# Altium PCB BMS_MAINBOARD_3.PcbDoc (part 2 of 3)
Units mm, origin at the board's own origin, x right, y up, seen from the top; angles counter-clockwise.
Board outline 295.3 x 101.15 mm, 2 copper layers (Top Layer, Bottom Layer), stack 1.571 mm thick; 250 components, 184 nets, 817 pads, 458 vias.
Unrouted connection lines stored in the file: 84.
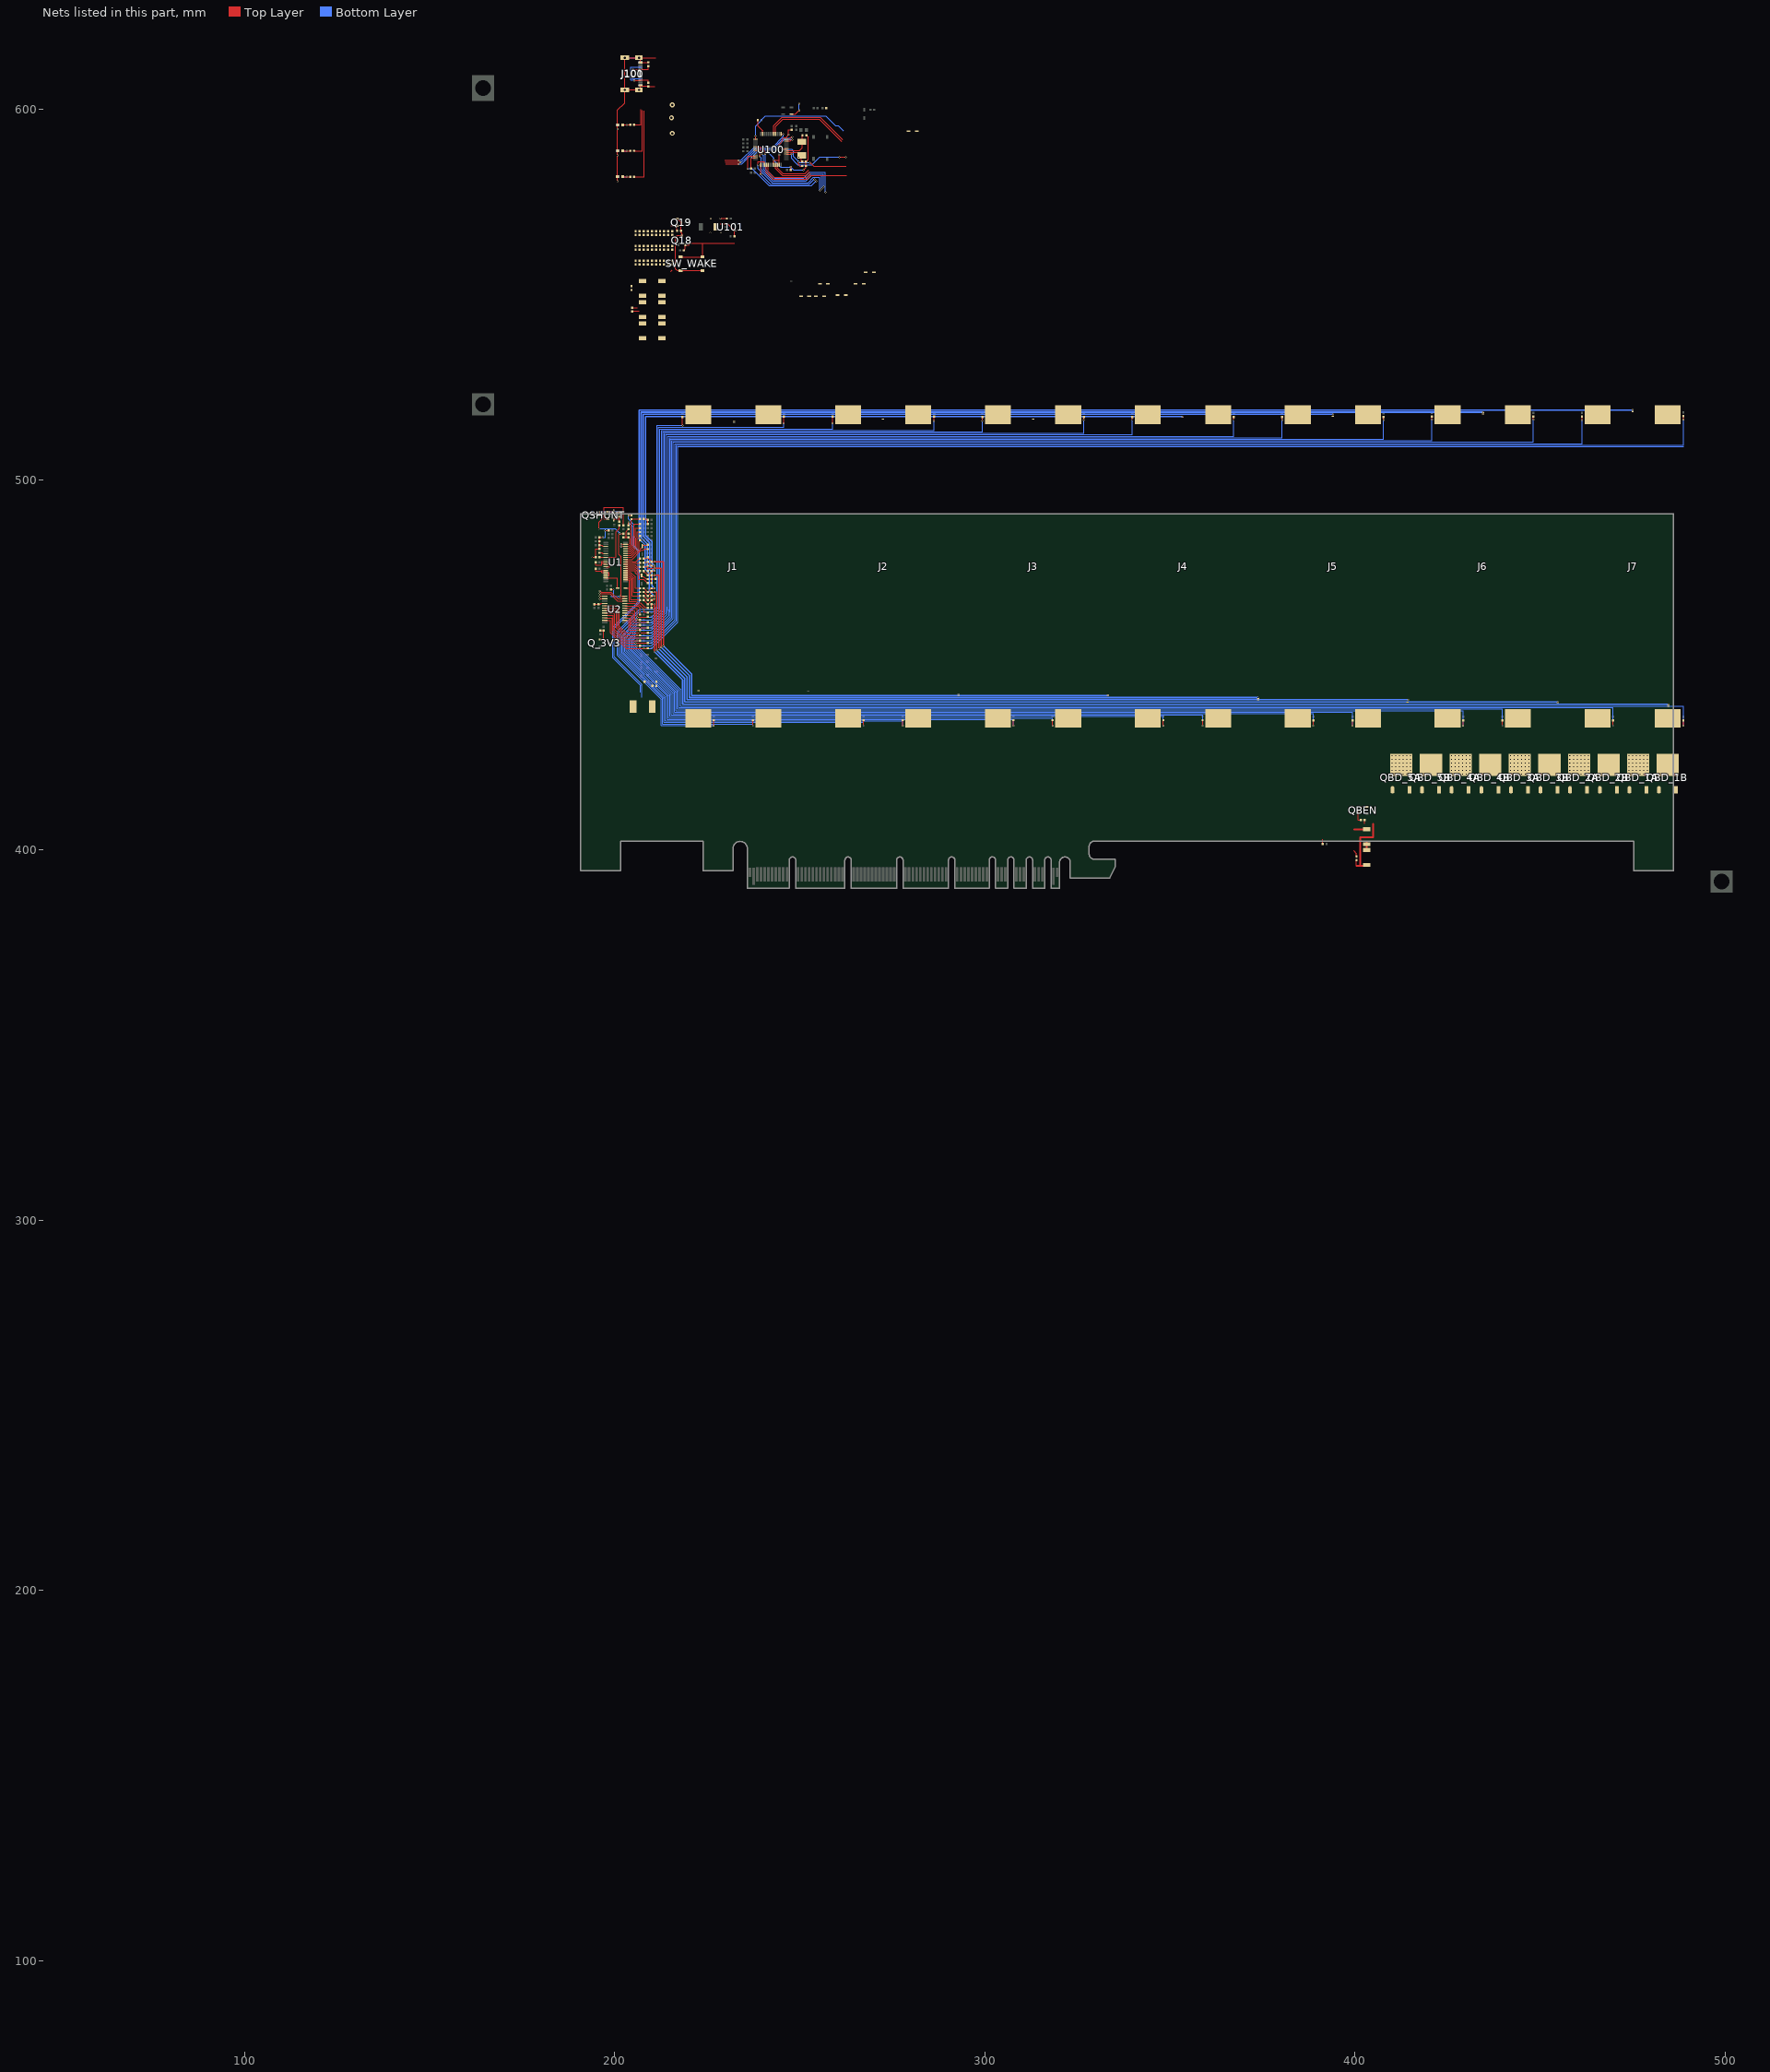
[diagram p2: the nets of this part, all layers, seen from the top]

## Via types
v1: diameter 0.48, hole 0.254, Top Layer to Bottom Layer, tented both sides, 384 vias
v2: diameter 0.508, hole 0.254, Top Layer to Bottom Layer, tented both sides, 54 vias
v3: diameter 1.27, hole 0.6, Top Layer to Bottom Layer, tented both sides, 20 vias

## Nets (pads, with @x,y where several pads share a name; then routed paths per layer and width w, separated by ;. In a path a pad name is that pad's centre, name@x,y a point inside that pad or via, vN(x,y) a via of type N, cw(c..) or ccw(c..) an arc to the next point about the centre after c; other vN are vias at no path point) (continued)
C6: CC5B.2 CC6.1 NT_C6.1 RC6.2 | length 158.7
  Top Layer w0.2: RC6.2@207.7,478.912 CC5B.2@209,478.912 ; CC5B.2@208.892,479.112 208.892,479.02 CC5B.2@209,478.912 ; CC6.1@209.808,477.912 CC6.1@209.9,477.912 ; CC6.1@209.9,477.712 CC6.1@209.9,477.912 ; CC6.1@209.908,477.912 CC6.1@210.1,477.912 ; CC6.1@210.1,477.812 CC6.1@210.1,477.912 ; CC6.1@210.1,478.012 CC6.1@210.1,477.912 ; v1@210.5,477.919 v1(210.7,477.919) ; v1@210.593,477.912 CC6.1@210.1,477.912 ; CC5B.2@209,478.912 209.9,478.012 CC6.1@209.9,477.912 ; CC6.1@209.9,477.912 CC6.1@210.1,477.912
  Top Layer w0.4: v1@210.7,477.9 213.1,477.9 v1(213.1,455.2)
  Bottom Layer w0.4: v1(213.1,455.2) 220.7,447.6 220.7,441.8 v1(333.3,441.8)
C7: CC6.2 CC7.1 NT_C7.2 RC7.2 | length 190.1
  Top Layer w0.2: RC7.2@207.7,477.612 RC7.2@207.808,477.612 207.908,477.712 CC6.2@208.7,477.712 ; CC6.2@208.95,477.762 CC7.1@209.95,476.762 ; CC7.1@209.908,476.812 CC7.1@210,476.812 ; v1@210.8,476.812 210.008,476.812 CC7.1@210,476.812 ; CC7.1@209.95,476.762 CC7.1@210,476.812 ; CC7.1@209.95,476.762 209.992,476.72 209.908,476.72 CC7.1@209.95,476.762
  Bottom Layer w0.4: v1@210.7,476.8 210,477.5 210,483.3 208.3,485 208.3,517.1 v1(353.5,517.1)
  other v1: 210.7,476.819
C8: CC7.2 CC8.1 NT_C8.1 RC8.2 | length 198.2
  Top Layer w0.2: RC8.2@207.608,476.612 CC7.2@208.9,476.612 ; CC8.1@208.9,475.212 208.9,476.119 ; CC7.2@208.9,476.719 CC7.2@208.9,476.612 ; v1(210.7,476.119) 208.9,476.119 ; 208.9,476.119 CC7.2@208.9,476.612
  Top Layer w0.4: v1(210.7,476.119) 212.5,476.119 v1(212.5,454.8)
  Bottom Layer w0.4: v1@210.7,476.1 v1(210.7,476.119) ; v1(212.5,454.8) 220.1,447.2 220.1,441.2 v1(373.8,441.2)
C9: CC8.2 CC9.1 NT_C9.2 RC9.2 | length 233.5
  Top Layer w0.2: RC9.2@207.654,475.266 207.846,475.266 208.6,474.512 CC9.1@208.8,474.512 ; CC9.1@208.892,474.312 208.9,474.312 209.9,475.312 CC8.2@209.9,475.412 ; CC8.2@209.908,475.412 v1@210.593,475.412
  Bottom Layer w0.4: v1@210.7,475.4 209.4,476.7 209.4,483 207.7,484.7 207.7,517.7 v1(394,517.7)
  other v1: 210.7,475.419
C10: CC9.2 CC10A.1 NT_C10.1 RC10A.2 RC10B.2 | length 237
  Top Layer w0.2: CC9.2@209.8,474.12 CC9.2@209.8,474.212 ; RC10B.2@209.908,472.112 RC10A.2@209.908,473.212 RC10A.2@209.908,473.312 ; v1@210.7,474.312 CC9.2@209.908,474.312 RC10A.2@209.908,473.312 ; CC10A.1@211,473.312 RC10A.2@209.908,473.312
  Top Layer w0.4: v1@210.7,474.3 211.9,474.3 v1(211.9,454.4)
  Bottom Layer w0.4: v1(211.9,454.4) 219.5,446.8 219.5,440.6 v1(414.3,440.6)
  other v1: 210.7,474.319
C11: CC10B.2 CC11.1 NT_C11.2 RC11.2 | length 280.4
  Top Layer w0.2: RC11.2@208,470.512 208.8,469.712 208.7,469.712 CC11.1@208.8,469.612 ; CC11.1@208.8,469.612 CC11.1@208.8,469.704 ; CC11.1@208.892,469.712 209.792,470.612 CC10B.2@209.9,470.612 ; CC10B.2@209.908,470.712 CC10B.2@210.1,470.712 ; CC10B.2@210,470.812 CC10B.2@210.1,470.712 ; v1@210.8,470.719 210.8,470.712 CC10B.2@210.1,470.712
  Bottom Layer w0.4: v1@210.7,470.7 210,471.4 210,475.1 208.8,476.3 208.8,482.7 207.1,484.4 207.1,518.3 v1(434.5,518.3)
  other v1: 210.7,470.719
C12: CC11.2 CC12.1 NT_C12.1 RC12.2 | length 273.3
  Top Layer w0.2: RC12.2@207.8,469.737 CC12.1@208.909,468.629 ; CC12.1@209,468.712 CC12.1@208.913,468.625 ; CC11.2@209.9,469.712 209.9,469.62 CC12.1@208.909,468.629 ; CC11.2@209.908,469.712 210,469.712 v1@210.6,469.712 ; CC12.1@208.9,468.612 CC12.1@208.892,468.612 CC12.1@208.909,468.629 ; CC12.1@208.9,468.612 CC12.1@208.913,468.625 ; CC12.1@208.9,468.612 208.925,468.612 CC12.1@208.913,468.625 ; CC12.1@208.909,468.629 CC12.1@208.913,468.625
  Top Layer w0.4: v1@210.7,469.7 211.3,469.7 v1(211.3,454)
  Bottom Layer w0.4: v1(211.3,454) 218.9,446.4 218.9,440 v1(454.8,440)
  other v1: 210.7,469.719
C13: CC12.2 CC13.1 NT_C13.2 NT_CSHORT.2 RC13.2 | length 324.4
  Top Layer w0.2: RC13.2@207.9,468.512 CC13.1@208.9,467.512 ; CC13.1@208.892,467.512 CC13.1@208.9,467.512 ; CC12.2@209.8,468.412 CC13.1@208.9,467.512 ; CC12.2@209.908,468.612 210.7,468.612 NT_CSHORT.2@210.7,468.269
  Bottom Layer w0.4: v1@210.7,468.6 209.3,470 209.3,474.8 208.2,475.9 208.2,482.4 206.5,484.1 206.5,518.9 v1(475,518.9)
  other v1: 210.7,468.619
C14: CC13.2 CC14.1 NT_CSHORT.1 RC14.2 | length 4.1
  Top Layer w0.2: RC14.2@207.8,467.512 CC14.1@208.9,466.412 CC13.2@209.9,467.412 ; CC13.2@209.908,467.512 210.7,467.512 ; 210.7,467.519 210.7,467.512 ; NT_CSHORT.1@210.7,467.869 210.7,467.512
C15: CC14.2 CC15.2 DS_1.1 NT_C14.1 QBD_1B.2 QBD_2B.2 QBD_3B.2 QBD_4B.2 QBD_5B.2 QSHUNT.3 | length 304.2
  Top Layer w0.2: QSHUNT.3@195.9,490.469 v1(195.9,491.419) ; CC15.2@209.9,465.512 CC14.2@209.9,466.412 ; CC14.2@209.9,466.512 CC14.2@209.9,466.412 ; CC14.2@209.916,466.212 CC14.2@209.916,466.412 ; v1@210.6,466.412 CC14.2@209.916,466.412 ; CC14.2@209.9,466.412 CC14.2@209.916,466.412
  Top Layer w0.4: v1(210.7,453.6) v1(210.7,466.419)
  Bottom Layer w0.4: v1(210.7,453.6) 218.3,446 218.3,439.4 v1@484.6,439.4
  Bottom Layer w0.5: v1(195.9,491.419) 200.781,491.419
  other v1: 484.7,439.4
CAN_RX: U100.45 | length 11
  Top Layer w0.2: U100.45@243.412,584.7 243.412,584.1 245.312,582.2 251.619,582.2 252.619,583.2
CAN_TX: U100.46 | length 10.4
  Top Layer w0.2: U100.46@243.912,585.075 243.912,584.2 245.412,582.7 251.419,582.7 252.419,583.7
CC1: J100.A5 J101.A5 R108.2 | length 9.6
  Top Layer w0.2: v2@204.919,611 204.919,610.95 J100.A5@206.916,610.95 209.019,610.95 R108.2@209.019,611.792 R108.2@209.019,611.8
  Bottom Layer w0.2: v2@204.719,610.9 204.719,608.45 J101.A5@206.916,608.45
  other v2: 204.819,610.9
CC2: J100.B5 J101.B5 R109.2 | length 11.5
  Top Layer w0.2: v2@205.219,608 205.269,607.95 J100.B5@206.916,607.95 206.966,608 209.019,608 R109.2@209.019,607.4
  Bottom Layer w0.2: v2@205.219,608 v2(205.219,607.9) 205.119,608 204.319,608 204.319,611.45 J101.B5@206.916,611.45
CELL1: J1.2 J1.4 NT_C1.1
CELL2: J1.3 J2.1 NT_C2.2
CELL3: J2.2 J2.4 NT_C3.1
CELL4: J2.3 J3.1 NT_C4.2
CELL5: J3.2 J3.4 NT_C5.1
CELL6: J3.3 J4.1 NT_C6.2
CELL7: J4.2 J4.4 NT_C7.1
CELL8: J4.3 J5.1 NT_C8.2
CELL9: J5.2 J5.4 NT_C9.1
CELL10: J5.3 J6.1 NT_C10.2
CELL11: J6.2 J6.4 NT_C11.1
CELL12: J6.3 J7.1 NT_C12.2
CELL13: J7.2 J7.4 NT_C13.1
CELL14: J7.3 NT_C14.2
CHIP_SELECT: U100.4 | length 19.1
  Top Layer w0.2: U100.4@246.337,588 v2(247.719,588) ; v1(260.619,587.2) v1(262.419,587.2)
  Bottom Layer w0.2: v2(247.719,588) v2@247.719,587.907 ; v2@247.866,588.053 247.766,587.953 v2@247.719,587.907 ; v1(260.619,587.2) 259.819,587.2 255.319,587.2 253.219,585.1 249.419,585.1 248.729,585.79 247.719,586.8 v2@247.719,587.907
COS: U100.16 | length 22.9
  Top Layer w0.2: U100.16@243.412,593.7 243.412,595.493 245.419,597.5 255.219,597.5 261.219,591.5
DATA_BUS_A0: D_ADR_0.1 U2.10 U100.40 | length 32.1
  Top Layer w0.2: v1@195.8,469.4 v1(195.9,469.3) 198.7,469.3 200.688,467.312 U2.10@202.2,467.312 ; U100.40@240.912,585 240.912,583.007 242.719,581.2 252.019,581.2 253.019,582.2 262.612,582.2
DATA_BUS_A1: D_ADR_1.1 U2.11 U100.41 | length 21.6
  Top Layer w0.2: v1@196,470 196.3,469.7 199,469.7 200.788,467.912 U2.11@202.3,467.912 ; U100.41@241.412,585.075 241.412,583.193 241.419,583.2 242.919,581.7 251.819,581.7 252.819,582.7
  Bottom Layer w0.2: 196.9,473.612 197,473.512
  other v1: 195.9,470
DATA_BUS_A2: D_ADR_2.1 U2.14 U100.39 | length 28.2
  Top Layer w0.2: v1@195.9,468 195.963,467.937 U2.14@197.25,467.937 ; v2@238.719,585.2 238.719,586 240.412,586 U100.39@240.412,585.075
  Bottom Layer w0.2: v2(238.719,585.1) 238.719,584.1 242.519,580.3 252.219,580.3 253.619,581.7 255.419,581.7 v1(255.419,578.2) v1@255.419,578.1
  other v1: 195.9,467.9
DATA_BUS_A3: D_ADR_3.1 U2.13 U100.31 | length 29.6
  Top Layer w0.2: v1(195.9,468.619) 197.1,468.619 197.093,468.612 U2.13@196.8,468.612 ; U100.31@237.987,589 238.812,589 239.112,588.7 239.112,587.407 v2(239.119,587.4)
  Bottom Layer w0.2: v2(239.119,587.4) 239.212,587.4 239.608,587.005 239.608,583.812 242.719,580.7 251.619,580.7 253.119,582.2 255.919,582.2 v1(255.919,578.7)
DATA_BUS_A4: D_ADR_4.1 U100.30 | length 28.1
  Top Layer w0.2: U100.30@238.312,589.5 238.912,589.5 239.712,588.7 v2(239.712,588)
  Bottom Layer w0.2: v2(239.712,588) 240.119,587.593 240.119,583.9 242.919,581.1 251.319,581.1 252.819,582.6 256.419,582.6 v1@256.419,579.3
  other v1: 256.419,579.2
DATA_BUS_A5: D_ADR_5.1 U100.29 | length 31.1
  Top Layer w0.2: U100.29@238.212,590 239.212,590 240.619,588.593 240.619,588.493 v2(240.619,588) ; v1@256.819,577.7 v1(256.919,577.7)
  Bottom Layer w0.2: v2(240.619,588) 240.619,584 243.119,581.5 251.019,581.5 252.619,583.1 256.919,583.1 v1(256.919,577.7)
DATA_BUS_A6: D_ADR_6.1 U100.25 | length 30.2
  Top Layer w0.2: U100.25@237.991,592.028 238.019,592 v2(238.019,592.9)
  Bottom Layer w0.2: v2@238.019,592.8 v2(238.019,592.9) 238.019,595.6 240.719,598.3 257.019,598.3 259.619,595.7 260.319,595.7 261.719,594.3
GND: C2.1 C100.1 C101.1 C102.1 C103.1 C104.1 C106.1 C107.1 CAP1.2 CAPSRC.2 CC0A.2 CC0B.1 CR1.2 CR2.2 CR3.2 CSNS0.1 CSNS2.2 DS_VCC.2 J1.1 J100.0 J100.A1_B12 J100.A12_B1 J101.0 J101.A1_B12 J101.A12_B1 LED_1.1 LED_1A.1 LED_2.1 LED_2A.1 LED_3.1 LED_3A.1 NT_1.2 NT_C0.2 Q18.2 QBEN.2 QBENR.2 R102.1 R108.1 R109.1 R110.2 R_Q18G.2 R_STBY2.1 R_VBUS3.1 RSNS.1 RSNSP.1 SW_WAKE.2 U1.3 U2.12 U100.23 U100.35 U100.44 U100.47 U101.1 | length 260.8
  Top Layer w0.2: v1@193.9,479.112 CAPSRC.2@194.792,479.112 ; CAPSRC.2@194.8,479.112 194.792,479.12 194.792,481.312 CAP1.2@195.7,481.312 ; CR3.2@195.7,483.212 CR3.2@195.8,483.112 ; v1(195.7,486.819) 195.7,488.619 196.6,489.519 ; CAP1.2@195.8,481.412 195.808,481.42 CR2.2@195.808,482.104 ; CR3.2@195.8,483.412 CR3.2@195.8,483.312 ; CR2.2@195.808,482.312 CR2.2@195.808,482.104 ; CR3.2@195.808,483.304 CR3.2@195.8,483.312 ; CR3.2@195.808,483.412 QBENR.2@195.808,484.519 196.5,484.519 ; U1.3@197.525,482.062 196.657,482.062 196.407,482.312 196.016,482.312 CR2.2@195.808,482.104 ; CR1.2@198.3,486.312 CR1.2@198.4,486.212 ; C2.1@198.908,470.412 v1(199.7,470.412) ; v1(200.702,580.7) LED_3.1@200.702,581.9 v1(200.702,587.7) v1(200.702,594.8) LED_1.1@200.702,595.9 ; LED_1.1@200.719,596.1 200.719,599.9 202.676,601.857 J100.0@202.676,605.37 J101.0@202.676,605.38 ; v2(201.4,468.6) 201.7,468.6 ; CSNS0.1@202.3,485.52 202.299,485.519 v1(201.4,485.519) 201.1,485.219 201.1,479.819 201.7,479.219 201.7,474.519 201.69,474.51 201.7,474.5 201.7,468.6 ; J100.0@202.619,605.4 202.639,605.38 J101.0@202.676,605.38 ; J101.0@202.676,614.03 206.489,614.03 J100.0@206.519,614 ; U2.12@202.7,468.582 202.7,468.6 201.7,468.6 ; J100.0@202.719,614 202.676,613.957 J101.0@202.676,605.38 ; v1(203.7,490.4) RSNSP.1@204.5,490.4 ; J101.0@206.536,605.38 J101.0@202.676,605.38 ; J101.0@206.536,614.03 211.089,614.03 ; J100.A12_B1@206.916,606.6 J100.A12_B1@206.916,606.4 ; J100.0@206.919,613.8 J100.A1_B12@206.919,612.8 ; J100.0@207.019,605.6 206.916,605.6 J100.A12_B1@206.916,606.4 ; J100.A1_B12@207.019,612.8 J100.A1_B12@206.919,612.8 ; CSNS2.2@207.619,489.5 CSNS2.2@207.719,489.5 ; CSNS2.2@207.9,489.5 208.5,489.5 CC0A.2@208.881,489.119 ; CC0A.2@208.7,489.119 CC0A.2@208.881,489.119 ; CC0B.1@208.8,488.012 208.892,488.104 CC0B.1@208.892,488.112 ; CC0B.1@208.884,488.196 CC0B.1@208.884,488.112 CC0B.1@208.892,488.112 ; CC0B.1@208.892,488.22 CC0B.1@208.9,488.212 ; CC0B.1@209,488.112 CC0B.1@208.9,488.112 ; R109.1@209.019,606.292 210.811,606.292 ; R109.1@209.019,606.4 J100.A12_B1@206.916,606.4 ; R108.1@209.119,612.8 J100.A1_B12@206.919,612.8 ; SW_WAKE.2@217.769,560.25 223.569,560.25 SW_WAKE.2@223.719,560.1 ; R_Q18G.2@218.627,562 219.019,562.392 Q18.2@219.019,563.4 ; Q18.2@219.019,563.5 220.019,563.5 220.419,563.9 223.719,563.9 ; SW_WAKE.2@223.669,560.25 223.669,563.85 223.719,563.9 ; 228.419,569.15 230.469,569.15 U101.1@232.219,567.4 ; v2@228.769,570.6 C104.1@230.219,570.6 ; 232.277,563.9 223.719,563.9 ; U101.1@232.312,567.35 232.369,567.35 C107.1@232.369,566 ; C102.1@236.819,584 v2@236.819,586.993 ; U100.35@237.987,587 v2(236.819,587) ; R110.2@238.512,597.207 238.512,597.2 238.619,597.093 238.619,595.6 238.912,595.307 238.912,595.3 239.912,594.3 U100.23@239.912,593.7 ; U100.44@242.912,585.4 242.919,585.407 v2@242.919,586.207 ; v2@242.912,586.2 v2@242.919,586.207 ; 243.719,586.4 v2(242.919,586.4) v2@242.919,586.207 ; 243.732,586.4 244.412,586.4 U100.47@244.412,585.2 ; v2@244.319,589.7 244.419,589.8 244.419,590.7 244.616,590.897 245.312,591.593 245.312,592.2 245.612,592.5 246.219,592.5 246.919,593.2 v2(246.919,593.3) 246.919,594.499 ; 244.419,586.1 v2(244.419,587.8) ; C103.1@247.519,583.8 v2(247.519,584.5) ; R102.1@247.812,594.592 247.012,594.592 ; v2(250.919,583.7) 251.019,583.7 251.619,584.3 C100.1@251.62,586 C100.1@251.619,586.007 ; C100.1@251.412,585.8 C100.1@251.419,585.807 ; C100.1@251.419,586.1 C100.1@251.419,585.807 ; C100.1@251.42,585.9 C100.1@251.42,585.808 ; C101.1@251.72,593.1 252.262,592.557 252.262,586.65 C100.1@251.619,586.007 ; v1@402.081,411.7 402.081,411.65 QBEN.2@403.231,411.65 ; CR3.2@195.8,483.312 195.8,482.112 CR2.2@195.808,482.104 ; J100.A1_B12@206.919,612.8 J100.A1_B12@206.916,612.8 J100.A1_B12@206.919,612.8 ; CC0A.2@208.881,489.119 208.9,489.119 CC0A.2@208.9,489.1 ; CC0A.2@208.881,489.119 CC0A.2@208.9,489.1 ; CC0B.1@208.892,488.112 CC0B.1@208.9,488.112 ; CC0B.1@208.9,488.112 CC0A.2@208.9,489.1 ; v2@236.819,586.993 236.812,587 v2(236.819,587) ; v2@236.819,586.993 v2(236.819,587) ; 246.919,594.499 247.012,594.592 ; 246.919,594.499 246.919,594.507 ; 246.919,594.507 247.004,594.592 ; 246.919,594.507 246.919,594.584 246.927,594.592 247.004,594.592 ; 247.004,594.592 247.012,594.6 247.012,594.592 ; 247.004,594.592 247.012,594.592 ; C100.1@251.419,585.807 C100.1@251.42,585.808 ; C100.1@251.42,585.808 C100.1@251.619,586.007 ; v1@197.4,486.312 CR1.2@198.292,486.312 198.285,486.319 v1(197.4,486.319) v1@197.4,486.312
  Bottom Layer w0.2: v1(195.7,486.819) 197.4,486.819 ; v1(196.8,484.519) 197.4,484.519 197.4,486.226 197.493,486.319 v1(197.4,486.319) ; v1@197.4,486.419 197.4,486.819 ; 198.99,468.61 199,468.6 199.7,468.6 ; v1@199.7,470.512 v1(199.7,470.412) 199.7,468.6 ; v1@200.719,580.6 LED_3A.1@200.719,581.9 ; v1@200.719,587.7 LED_2A.1@200.719,588.9 ; v1@200.719,594.9 LED_1A.1@200.719,595.9 ; v2(201.4,468.6) 199.7,468.6 ; v1(201.4,485.519) v1@201.507,485.519 ; v1@201.4,485.669 201.25,485.669 200.1,486.819 197.4,486.819 ; J101.0@202.676,614.03 205.989,614.03 J100.0@206.019,614 ; J100.0@202.819,605.4 202.839,605.38 J101.0@206.536,605.38 ; v1(203.7,490.4) 203.7,489.4 205.2,487.9 205.2,482.3 206.7,480.8 206.7,466.9 199.8,460 199.8,452.2 207.3,444.7 207.3,441.3 ; J100.0@206.819,605.8 206.916,605.897 J101.A1_B12@206.916,606.6 ; J101.A12_B1@206.916,612.8 206.916,613.997 J100.0@206.919,614 ; v2(236.819,587) 238.519,588.7 241.219,588.7 242.919,587 v2(242.919,586.4) 244.819,584.5 v2(247.519,584.5) ; v2@244.419,588 v2(244.419,589.6) ; v2@247.619,584.4 248.319,583.7 v2(250.919,583.7)
  other v1: 402.081,411.6 193.9,479.119 225.819,566.8 228.619,566.8
  other v2: 225.869,570.65 228.569,570.65
  other v3: 215.519,593.6 215.3,597.8 215.519,601.3
GQBD: DBD_2.2 GQBDR.2 QBD_1A.1 QBD_1B.1 QBD_2A.1 QBD_2B.1 QBD_3A.1 QBD_3B.1 QBD_4A.1 QBD_4B.1 QBD_5A.1 QBD_5B.1 RBEN.2 | length 20.2
  Top Layer w0.2: 400.381,395.7 GQBDR.2@400.381,397.292 ; 402.581,407.1 402.589,407.108 RBEN.2@402.589,408.1
  Top Layer w0.5: 400.381,395.7 DBD_2.2@403.181,395.7 ; 401.381,395.8 401.381,403.5 404.881,403.5 404.881,407.1
GQS: DBD_1.1 GQBDR.1 QBD_1A.3 QBD_1B.3 QBD_2A.3 QBD_2B.3 QBD_3A.3 QBD_3B.3 QBD_4A.3 QBD_4B.3 QBD_5A.3 QBD_5B.3 | length 5.2
  Top Layer w0.2: 399.581,399.9 400.381,399.1 GQBDR.1@400.381,398.308
  Top Layer w0.5: 399.781,405.6 DBD_1.1@403.081,405.6
HOTPLUG_OUT: D_3V3_O.1 | length 4.3
  Top Layer w0.2: D_3V3_O.1@247.719,598.8 248.819,598.8 v2(249.819,599.8)
  Bottom Layer w0.2: v2(249.819,599.8) v1(249.819,601.6)
I2C_A0: D_ADR_0.2
I2C_A1: D_ADR_1.2
I2C_A2: D_ADR_2.2
I2C_A3: D_ADR_3.2
I2C_A4: D_ADR_4.2
I2C_A5: D_ADR_5.2
I2C_A6: D_ADR_6.2 | length 0
I2C_ASNS: 
LED_1: RLED_1.2 U100.13 | length 25.7
  Top Layer w0.2: RLED_1.2@205.119,595.9 RLED_1.2@205.21,595.9 207.019,595.9 207.019,600 ; 229.719,586.3 v2(233.419,586.3) ; U100.13@244.912,593.3 245.012,593.4 v2(245.512,593.4)
  Bottom Layer w0.2: v2(233.419,586.3) 234.119,586.3 237.719,589.9 242.619,589.9 245.512,592.793 v2(245.512,593.4)
LED_2: RLED_2.2 U100.12 | length 36.3
  Top Layer w0.2: RLED_2.2@205.319,588.9 RLED_2.2@205.502,588.9 ; RLED_2.2@205.402,589 RLED_2.2@205.502,588.9 ; 207.419,599.8 207.419,588.9 206.302,588.9 RLED_2.2@205.502,588.9 ; 229.819,585.8 v2(233.919,585.8) ; U100.12@246.337,592.025 247.144,592.025 247.819,592.7 v2(247.919,592.7)
  Bottom Layer w0.2: v2(233.919,585.8) 234.219,585.8 235.419,587 ; 235.669,587.25 235.419,587 ; v2(247.919,592.7) 247.519,592.3 245.619,592.3 244.419,591.1 242.819,589.5 237.919,589.5 235.419,587
LED_3: RLED_3.2 U100.11 | length 43.8
  Top Layer w0.2: RLED_3.2@205.21,581.9 206.202,581.9 ; RLED_3.2@205.419,581.9 207.919,581.9 207.919,599.7 ; 229.919,585.3 v2(233.419,585.3) ; U100.11@246.419,591.5 246.444,591.525 247.344,591.525 247.719,591.9 v2(247.919,591.9)
  Bottom Layer w0.2: v2@233.319,585.3 v2(233.419,585.3) 234.319,585.3 238.119,589.1 243.019,589.1 245.819,591.9 v2(247.919,591.9)
Net3V3R1_2: 3V3R1.2 3V3R2.1 Q_3V3.1 | length 4.3
  Top Layer w0.2: 3V3R2.1@196,459.292 196.992,459.292 3V3R1.2@197,459.3 ; Q_3V3.1@196.05,456.869 196.05,456.919 197,456.919 197,459.1 3V3R1.2@197.1,459.2
NetC100_2: C100.2 U100.5 Y100.1 | length 5.9
  Top Layer w0.2: U100.5@246.337,588.5 249.219,588.5 249.712,588.007 v2(249.712,587.2) Y100.1@249.812,587.2 ; Y100.1@249.704,586.992 Y100.1@249.712,587 ; Y100.1@249.912,587.5 Y100.1@250.012,587.6 ; C100.2@250.404,585.9 250.404,586.992 Y100.1@250.512,587.1
NetC101_2: C101.2 U100.6 Y100.2 | length 8.4
  Top Layer w0.2: U100.6@246.337,589 249.919,589 250.619,589.7 250.619,590 Y100.2@250.619,590.7 ; Y100.2@249.904,591.3 Y100.2@249.912,591.3 ; C101.2@250.604,593.1 250.604,591.708 Y100.2@250.612,591.7 ; 250.612,590.193 250.612,590.8 Y100.2@251.412,590.8
NetCAP1_1: CAP1.1 U1.7 | length 1.7
  Top Layer w0.2: CAP1.1@195.9,480.312 196.407,480.312 196.657,480.062 U1.7@197.525,480.062
NetCAP2_1: CAP2.1 U1.11 U1.12 U1.14 | length 7.4
  Top Layer w0.2: CAP2.1@194.792,477.512 194.792,477.02 194.8,477.012 196.5,477.012 196.5,477.612 ; U1.11@197,478.012 196.5,478.012 196.5,477.612 ; U1.14@197.525,476.562 198.6,476.562 198.6,477.612 U1.12@198.1,477.612 ; U1.12@197.525,477.562 196.55,477.562 196.5,477.612
NetCAP3_1: CAP3.1 U1.16 U1.17 U1.19 | length 6.8
  Top Layer w0.2: CAP3.1@194.8,476.112 194.8,475.419 196.5,475.419 ; 196.5,475.012 U1.17@196.975,475.012 ; 196.5,475.019 196.5,475.419 ; U1.19@197.525,474.062 197.575,474.112 198.5,474.112 198.5,475.012 U1.17@198,475.012 ; U1.16@197.525,475.562 196.5,475.562 196.5,475.419
NetCC15_1: CC15.1 DC15.2 U1.24 | length 13.4
  Top Layer w0.2: DC15.2@202.9,470.8 203.9,470.8 ; U1.24@202.975,473.062 203.75,473.062 203.9,472.912 203.9,471.019 ; 203.893,471.012 203.9,471.019 ; CC15.1@208.8,465.412 208.693,465.519 208.2,465.519 206.95,466.769 206.05,466.769 205.7,467.119 203.9,467.119 203.9,470.8 ; 203.9,470.8 203.9,471.012 203.9,471.019
NetDBD_1_2: DBD_1.2 DBD_2.1 | length 1.7
  Top Layer w0.5: DBD_2.1@403.081,400.4 DBD_1.2@403.081,402.1
NetDC5_2: DC5.2 RC5A.1 U1.36 | length 7.1
  Top Layer w0.2: U1.36@202.975,479.062 204.55,479.062 207.388,481.9 DC5.2@207.5,481.9 ; DC5.2@207.6,482.312 RC5A.1@208.992,482.312
NetDC10_2: DC10.2 RC10A.1 U1.30 | length 6.9
  Top Layer w0.2: U1.30@202.875,476.062 205.35,476.062 206,475.412 206,475.112 206.6,474.512 DC10.2@207.1,474.512 ; DC10.2@207.307,473.919 207.693,473.919 208.4,473.212 RC10A.1@208.892,473.212
NetDC15_1: DC15.1 U1.20 | length 5.8
  Top Layer w0.2: U1.20@197.525,473.562 200.7,473.562 DC15.1@200.7,470.912
NetDS_1_2: DS_1.2 DS_2.1
NetDS_2_2: DS_2.2 DS_3.1
NetDS_3_2: DS_3.2 DS_4.1
NetDS_4_2: DS_4.2 DS_5.1 RDS_5.1 | length 1.8
  Top Layer w0.2: RDS_5.1@204.719,545.592 206.511,545.592
NetDS_5_2: DS_5.2 DS_6.1 RDS_5.2 RDS_6.1 | length 1.3
  Top Layer w0.2: RDS_5.2@204.719,546.508 206.027,546.508
NetDS_6_2: DS_6.2 RDS_6.2 RS_0.2 RS_1.2 RS_2.2 RS_3.2 RS_4.2 RS_5.2 RS_6.2 RS_7.2 RS_8.2 RS_9.2 | length 0.6
  Top Layer w0.2: 215.112,556.3 215.512,556.7
NetDSHUNT_1: DSHUNT.1 RSHUNT2.1 RSHUNT3.2 | length 2.8
  Top Layer w0.2: DSHUNT.1@199.8,489.312 199.907,489.419 201.2,489.419 ; RSHUNT3.2@201.2,488.727 201.2,489.419 ; RSHUNT2.1@201.2,490.119 RSHUNT2.1@201.2,490.111 201.2,489.419
NetDSHUNT_2: DSHUNT.2 QSHUNT.2 RSHUNT2.2 | length 3
  Top Layer w0.2: QSHUNT.2@198.2,491.419 DSHUNT.2@199.6,491.419 ; DSHUNT.2@199.6,491.262 RSHUNT2.2@201.25,491.262
NetLED_1_2: LED_1.2 LED_1A.2 RLED_1.1 | length 3
  Top Layer w0.2: LED_1.2@202.102,595.9 LED_1.2@202.302,595.9 ; LED_1.2@202.202,596 LED_1.2@202.302,595.9 ; RLED_1.1@203.994,595.9 LED_1.2@202.302,595.9
  Bottom Layer w0.2: LED_1A.2@202.119,595.9 v1@203.119,595.9
  other v1: 203.202,595.9
NetLED_2_2: LED_2.2 LED_2A.2 RLED_2.1 | length 3.1
  Top Layer w0.2: LED_2.2@202.102,588.9 RLED_2.1@203.994,588.9 ; RLED_2.1@204.194,588.9 RLED_2.1@204.302,588.9
  Bottom Layer w0.2: LED_2A.2@202.119,588.9 v1@203.219,588.9
  other v1: 203.202,588.9
NetLED_3_2: LED_3.2 LED_3A.2 RLED_3.1 | length 2.9
  Top Layer w0.2: LED_3.2@202.102,581.9 RLED_3.1@203.994,581.9
  Bottom Layer w0.2: LED_3A.2@202.119,581.9 v1@203.119,581.9
  other v1: 203.202,581.9
NetQ18_3: Q18.3 Q19.1 R18.2 SW_WAKE.1 | length 22.9
  Top Layer w0.2: Q19.1@216.862,570.55 217.819,569.593 R18.2@217.819,567.3 ; R18.2@217.819,567.1 217.819,566.8 218.119,566.5 Q18.3@218.119,566 ; Q18.3@218.119,565.8 Q18.3@218.119,566 ; SW_WAKE.1@223.619,556.5 223.569,556.55 SW_WAKE.1@217.769,556.55 216.869,556.55 216.419,557 216.419,565.6 216.819,566 Q18.3@218.119,566
NetQ19_2: Q19.2 R18.1 RS_20.1 RS_21.1 RS_22.1 RS_23.1 RS_24.1 RS_25.1 RS_26.1 RS_27.1 RS_28.1 RS_29.1 | length 2.9
  Top Layer w0.2: 215.169,568.65 Q19.2@216.862,568.65 ; R18.1@216.811,567.3 216.811,568.492 Q19.2@216.819,568.5
NetQBEN_3: QBEN.3 RBEN.1 | length 3.1
  Top Layer w0.2: QBEN.3@400.881,410.5 400.881,408.1 RBEN.1@401.573,408.1
NetQSHUNT_1: QSHUNT.1 RSHUNT.2 | length 14
  Top Layer w0.2: QSHUNT.1@198.2,489.519 197.1,489.519 197.1,492.519 202.3,492.519 RSHUNT.2@202.3,487.819
NetR_VBUS1_1: R_VBUS1.1 R_VBUS2.2
NetRC0_1: RC0.1 U1.41 | length 9.7
  Top Layer w0.2: U1.41@202.975,481.562 203.95,481.562 204.7,482.312 204.9,482.512 204.9,484.712 205.2,485.012 205.2,485.812 205.2,488.119 206.646,488.119 206.646,487.966 RC0.1@206.65,487.962 ; RC0.1@206.792,488.112 RC0.1@206.8,488.112
NetRC1_1: RC1.1 U1.40 | length 9
  Top Layer w0.2: U1.40@202.975,481.062 204.05,481.062 205.1,482.112 205.3,482.312 205.3,484.512 205.6,484.812 205.6,485.612 205.6,487.019 206.7,487.019 RC1.1@206.7,486.812 ; RC1.1@206.792,487.012 RC1.1@206.8,487.012
NetRC2_1: RC2.1 U1.39 | length 8.1
  Top Layer w0.2: U1.39@202.975,480.562 204.15,480.562 205.7,482.112 205.7,484.312 206,484.612 206,485.919 206.693,485.919 RC2.1@206.7,485.912 ; RC2.1@206.8,485.912 RC2.1@206.9,485.912
NetRC3_1: RC3.1 U1.38 | length 8.9
  Top Layer w0.2: U1.38@202.875,480.062 204.15,480.062 204.25,480.062 ; U1.38@202.975,480.062 204.25,480.062 ; 204.3,480.112 206.1,481.912 206.1,484.112 RC3.1@206.642,484.654 ; 204.7,480.512 204.25,480.062 ; RC3.1@206.792,484.804 RC3.1@206.792,484.812 RC3.1@206.9,484.812
NetRC4_1: RC4.1 U1.37 | length 6.5
  Top Layer w0.2: U1.37@202.975,479.562 204.45,479.562 206.5,481.612 206.5,483.312 RC4.1@206.7,483.512 ; RC4.1@206.792,483.704 RC4.1@206.792,483.712 206.8,483.712 RC4.1@206.9,483.812
NetRC5B_1: RC5B.1 U1.35 | length 7
  Top Layer w0.2: U1.35@202.975,478.562 204.65,478.562 207.1,481.012 207.7,481.012 208,481.312 RC5B.1@208.8,481.312
NetRC6_1: RC6.1 U1.34 | length 4.7
  Top Layer w0.2: U1.34@202.975,478.062 204.65,478.062 204.8,477.912 205.7,477.912 206.4,478.612 ; 205.85,478.062 206.4,478.612 ; RC6.1@206.5,478.612 206.4,478.612
NetRC7_1: RC7.1 U1.33 | length 4.5
  Top Layer w0.2: U1.33@202.475,477.562 202.525,477.512 206.792,477.512 RC7.1@207,477.512
NetRC8_1: RC8.1 U1.32 | length 4
  Top Layer w0.2: U1.32@202.975,477.062 205.45,477.062 206,476.512 RC8.1@206.6,476.512 ; RC8.1@206.7,476.512 RC8.1@206.8,476.612
NetRC9_1: RC9.1 U1.31 | length 4.5
  Top Layer w0.2: U1.31@202.975,476.562 205.4,476.562 206.375,475.587 ; RC9.1@206.6,475.612 206.575,475.587 206.375,475.587 ; RC9.1@206.8,475.512 206.45,475.512 206.375,475.587
NetRC10B_1: RC10B.1 U1.29 | length 8
  Top Layer w0.2: U1.29@202.975,475.562 205.25,475.562 205.6,475.212 205.6,474.912 206.4,474.112 206.4,473.112 206.6,473.112 207.8,473.112 208.6,472.312 RC10B.1@208.9,472.312
NetRC11_1: RC11.1 U1.28 | length 7.3
  Top Layer w0.2: U1.28@202.975,475.062 204.15,475.062 205.5,473.712 205.5,470.719 206.607,470.719 RC11.1@206.7,470.812
NetRC12_1: RC12.1 U1.27 | length 8.1
  Top Layer w0.2: U1.27@202.975,474.562 204.05,474.562 205.1,473.512 205.1,471.812 205.1,469.719 206.799,469.719 RC12.1@206.846,469.766
NetRC13_1: RC13.1 U1.26 | length 8.9
  Top Layer w0.2: U1.26@202.975,474.062 203.95,474.062 204.7,473.312 204.7,471.612 204.7,468.619 206.7,468.619 RC13.1@206.7,468.812
NetRC14_1: RC14.1 U1.25 | length 9.4
  Top Layer w0.2: U1.25@202.975,473.562 203.85,473.562 204.3,473.112 204.3,471.412 204.3,467.619 206.693,467.619 RC14.1@206.7,467.612
NetRS_0_1: RS_0.1 RS_10.2
NetRS_1_1: RS_1.1 RS_11.2
NetRS_2_1: RS_2.1 RS_12.2
NetRS_3_1: RS_3.1 RS_13.2
NetRS_4_1: RS_4.1 RS_14.2
NetRS_5_1: RS_5.1 RS_15.2
NetRS_6_1: RS_6.1 RS_16.2
NetRS_7_1: RS_7.1 RS_17.2
NetRS_8_1: RS_8.1 RS_18.2
NetRS_9_1: RS_9.1 RS_19.2
NetRS_10_1: RS_10.1 RS_20.2
NetRS_11_1: RS_11.1 RS_21.2
NetRS_12_1: RS_12.1 RS_22.2
NetRS_13_1: RS_13.1 RS_23.2
NetRS_14_1: RS_14.1 RS_24.2
NetRS_15_1: RS_15.1 RS_25.2
NetRS_16_1: RS_16.1 RS_26.2
NetRS_17_1: RS_17.1 RS_27.2
NetRS_18_1: RS_18.1 RS_28.2
NetRS_19_1: RS_19.1 RS_29.2
NRST: C106.2 U100.7 | length 23
  Top Layer w0.2: v2@245.112,589.2 245.412,589.5 U100.7@246.337,589.5 ; v2@249.712,585.85 249.619,585.757 249.619,585.2 250.069,584.75 C106.2@250.354,584.75 ; v2(252.719,585.7) 253.719,584.7 262.412,584.7
  Bottom Layer w0.2: v2(245.112,589.3) 247.712,589.3 248.312,588.7 248.312,587.307 249.612,586.007 249.612,586 v2(249.662,585.95) 249.916,585.697 249.919,585.7 v2(252.719,585.7)
PACK+: QBD_1A.2 QBD_2A.2 QBD_3A.2 QBD_4A.2 QBD_5A.2 R_VBUS1.2
  other v1: 410,420.5 411,420.5 412,420.5 413,420.5 414,420.5 415,420.5 426,420.5 427,420.5 428,420.5 429,420.5 430,420.5 431,420.5 442,420.5 443,420.5 444,420.5 445,420.5 446,420.5 447,420.5 458,420.5 459,420.5 460,420.5 461,420.5 462,420.5 463,420.5 474,420.5 475,420.5 476,420.5 477,420.5 478,420.5 479,420.5 410,421.5 411,421.5 412,421.5 413,421.5 414,421.5 415,421.5 426,421.5 427,421.5 428,421.5 429,421.5 430,421.5 431,421.5 442,421.5 443,421.5 444,421.5 445,421.5 446,421.5 447,421.5 458,421.5 459,421.5 460,421.5 461,421.5 462,421.5 463,421.5 474,421.5 475,421.5 476,421.5 477,421.5 478,421.5 479,421.5 410,422.5 411,422.5 412,422.5 413,422.5 414,422.5 415,422.5 426,422.5 427,422.5 428,422.5 429,422.5 430,422.5 431,422.5 442,422.5 443,422.5 444,422.5 445,422.5 446,422.5 447,422.5 458,422.5 459,422.5 460,422.5 461,422.5 462,422.5 463,422.5 474,422.5 475,422.5 476,422.5 477,422.5 478,422.5 479,422.5 410,423.5 411,423.5 412,423.5 413,423.5 414,423.5 415,423.5 426,423.5 427,423.5 428,423.5 429,423.5 430,423.5 431,423.5 442,423.5 443,423.5 444,423.5 445,423.5 446,423.5 447,423.5 458,423.5 459,423.5 460,423.5 461,423.5 462,423.5 463,423.5 474,423.5 475,423.5 476,423.5 477,423.5 478,423.5 479,423.5 410,424.5 411,424.5 412,424.5 413,424.5 414,424.5 415,424.5 426,424.5 427,424.5 428,424.5 429,424.5 430,424.5 431,424.5 442,424.5 443,424.5 444,424.5 445,424.5 446,424.5 447,424.5 458,424.5 459,424.5 460,424.5 461,424.5 462,424.5 463,424.5 474,424.5 475,424.5 476,424.5 477,424.5 478,424.5 479,424.5 410,425.5 411,425.5 412,425.5 413,425.5 414,425.5 415,425.5 426,425.5 427,425.5 428,425.5 429,425.5 430,425.5 431,425.5 442,425.5 443,425.5 444,425.5 445,425.5 446,425.5 447,425.5 458,425.5 459,425.5 460,425.5 461,425.5 462,425.5 463,425.5 474,425.5 475,425.5 476,425.5 477,425.5 478,425.5 479,425.5
PACK-: RSNS.2 RSNSN.1 | length 53.8
  Top Layer w0.2: RSNSN.1@203.7,487.72 203.7,488.5 v1@203.8,488.5
  Bottom Layer w0.2: v1(203.7,488.519) 204.8,487.419 204.8,482.2 206.3,480.7 206.3,467.1 199.4,460.2 199.4,452 206.9,444.5 206.9,442.6
REGSRC: CAPSRC.1 RSHUNT3.1 U1.9 | length 13.6
  Top Layer w0.2: CAPSRC.1@195.8,479.012 195.85,479.062 U1.9@197.525,479.062 197.575,479.112 200.293,479.112 ; 200.3,479.119 200.3,485.919 201.2,486.819 RSHUNT3.1@201.2,487.711 RSHUNT3.1@201.2,487.719 ; CAPSRC.1@195.9,479.112 195.95,479.062 CAPSRC.1@195.9,479.112
SIN: U100.17 | length 24.2
  Top Layer w0.2: U100.17@242.912,593.4 242.912,595.693 245.119,597.9 255.519,597.9 261.419,592
SRN: CSNS0.2 CSNS1.1 RSNSN.2 U1.43 | length 7.9
  Top Layer w0.2: v1@201.8,482.712 201.8,482.612 201.85,482.562 U1.43@202.875,482.562 203.65,482.562 204,482.912 204,484.212 203.8,484.412 CSNS1.1@203.6,484.412 ; CSNS0.2@202.1,484.504 CSNS0.2@202.3,484.504 CSNS1.1@203.6,484.504 ; 203,484.512 203,486.012 RSNSN.2@203.442,486.454
  Bottom Layer w0.2: v1@201.693,482.719 v1(201.7,482.712)
SRP: CSNS1.2 CSNS2.1 RSNSP.2 U1.42 | length 13.2
  Top Layer w0.2: v1@201.7,481.912 201.85,482.062 U1.42@202.875,482.062 203.85,482.062 204.4,482.612 RSNSP.2@204.4,489.212 ; CSNS1.2@203.5,485.52 CSNS1.2@203.7,485.52 204.292,485.52 204.3,485.512 ; RSNSP.2@204.4,489.404 RSNSP.2@204.5,489.404 205.592,489.404 ; 205.6,489.412 205.592,489.404 ; CSNS2.1@206.7,489.404 205.592,489.404 ; CSNS2.1@206.804,489.5 CSNS2.1@206.811,489.5 CSNS2.1@206.819,489.5
  Bottom Layer w0.2: 201.393,482.219 v1@201.7,481.912
  other v1: 201.7,482.012
SWCLK: U100.37 | length 18.7
  Top Layer w0.2: v2@239.412,582.5 U100.37@239.412,585.075
  Bottom Layer w0.2: v2@239.469,582.55 239.469,582.45 242.019,579.9 252.519,579.9 253.819,581.2 v1(253.919,581.2)
  other v2: 239.419,582.5
SWDIO: U100.34 | length 26.3
  Top Layer w0.2: v2(235.919,584.1) 235.919,587.4 236.019,587.5 U100.34@237.987,587.5
  Bottom Layer w0.2: v2(235.919,584.1) 237.019,584.1 241.619,579.5 253.119,579.5 254.319,580.7 v1(254.419,580.7)
TS2: U1.13
TS3: U1.18 | length 0.1
  Top Layer w0.2: U1.18@197.475,474.612 U1.18@197.525,474.562
TS_0: RT_0b.1 TS_C1_A.2 TS_C1_B.2 U2.9 | length 125.3
  Top Layer w0.2: U2.9@202.7,466.612 U2.9@202.707,466.619 ; U2.9@202.7,466.632 205.387,466.632 205.6,466.419 ; 205.507,466.512 205.7,466.319 206.6,466.319 v1(207.9,465.019) 207.9,464.319 208.792,464.319 RT_0b.1@208.892,464.219 RT_0b.1@209,464.219 ; v1(218.3,514.7) TS_C1_B.2@218.3,516.8 ; v1(226.7,433.6) TS_C1_A.2@226.7,435.092 TS_C1_A.2@226.7,435.1
  Bottom Layer w0.2: v1@218.3,514.6 218.2,514.7 211.4,514.7 211.4,465.8 210.619,465.019 v1(207.9,465.019) 206.619,465.019 200.7,459.1 200.7,452.6 212.5,440.8 212.5,433.7 v1@226.7,433.7
TS_1: RT_1B.1 TS_C2_A.2 TS_C2_B.2 U2.8 | length 160.8
  Top Layer w0.2: U2.8@202.7,466.012 202.793,465.919 206.3,465.919 206.8,465.419 v1(206.8,464.419) 206.8,463.619 RT_1B.1@206.792,463.619 ; v1(237.3,433.6) TS_C2_A.2@237.3,435 ; v1(245.6,515.3) TS_C2_B.2@245.6,516.9
  Bottom Layer w0.2: v1(237.3,433.6) 237.3,434.1 212.9,434.1 212.9,441 201.1,452.8 201.1,458.8 206.719,464.419 v1(206.8,464.419) 210.719,464.419 211.8,465.5 211.8,514.2 245.6,514.2 v1(245.6,515.3) v1@245.6,515.4
TS_2: RT_2B.1 TS_C3_A.2 TS_C3_B.2 U2.7 | length 205.7
  Top Layer w0.2: U2.7@202.7,465.312 206,465.312 206,462.919 RT_2B.1@208.8,462.919 ; v1(258.8,515.3) 258.8,517 TS_C3_B.2@258.9,517 ; v1(267.2,433.6) TS_C3_A.2@267.2,435
  Bottom Layer w0.2: 207.9,462.919 208.1,462.919 208.1,462.912 ; v1(258.8,515.3) 258.8,513.8 212.2,513.8 212.2,465.2 209.912,462.912 208.1,462.912 ; v1(267.2,433.6) 267.2,434.5 213.3,434.5 213.3,441.2 201.5,453 201.5,458.4 206.012,462.912 v1(206.1,462.912) 208.1,462.912
TS_3: RT_3B.1 TS_C4_A.2 TS_C4_B.2 U2.6 | length 240.6
  Top Layer w0.2: U2.6@202.8,464.712 205.4,464.712 205.4,462.219 RT_3B.1@206.7,462.219 ; v1(277.8,433.6) TS_C4_A.2@277.8,435.092 TS_C4_A.2@277.8,435.1 ; v1(286.2,515.9) TS_C4_B.2@286.2,517.1
  Bottom Layer w0.2: v1(277.8,433.6) 277.8,434.9 213.7,434.9 213.7,441.4 201.9,453.2 201.9,458 v1(206.1,462.2) 209.9,462.2 212.6,464.9 212.6,513.4 286.2,513.4 v1(286.2,515.9)
TS_4: RT_4B.1 TS_C5_A.2 TS_C5_B.2 U2.5 | length 285.2
  Top Layer w0.2: U2.5@202.7,464.012 205,464.012 205,461.519 RT_4B.1@208.892,461.519 RT_4B.1@208.9,461.519 ; v1(299.3,515.9) TS_C5_B.2@299.3,516.9 ; v1(307.7,433.6) TS_C5_A.2@307.7,435.092 TS_C5_A.2@307.7,435.2
  Bottom Layer w0.2: v1(299.3,515.9) 299.3,513 213,513 213,464.6 209.9,461.5 v1(206.8,461.5) 206,461.5 202.3,457.8 202.3,453.4 214.1,441.6 214.1,435.3 307.7,435.3 v1(307.7,433.6) v1@307.7,433.5
TS_5: RT_5B.1 TS_C6_A.2 TS_C6_B.2 U2.4 | length 320.1
  Top Layer w0.2: U2.4@202.7,463.412 204.6,463.412 204.6,460.819 204.619,460.8 v1(206.1,460.8) 206.681,460.8 RT_5B.1@206.7,460.819 ; v1(318.3,433.6) TS_C6_A.2@318.3,435.092 TS_C6_A.2@318.3,435.1 ; v1(326.7,516.2) TS_C6_B.2@326.7,516.9
  Bottom Layer w0.2: v1(318.3,433.6) 318.3,435.4 318.3,435.7 214.5,435.7 214.5,441.8 202.7,453.6 202.7,457.5 206,460.8 v1(206.1,460.8) 209.9,460.8 213.4,464.3 213.4,512.6 326.7,512.6 v1(326.7,516.2)
TS_6: RT_6B.1 TS_C7_A.2 TS_C7_B.2 U2.3 | length 364.6
  Top Layer w0.2: U2.3@202.7,462.732 202.732,462.7 204.2,462.7 204.2,460.119 RT_6B.1@208.892,460.119 ; TS_C7_B.2@339.7,516.9 339.8,516.8 v1(339.8,516.2) ; v1(348.2,433.619) TS_C7_A.2@348.2,435.1
  Bottom Layer w0.2: v1(339.8,516.2) 339.8,512.2 213.8,512.2 213.8,464 209.9,460.1 v1(206.8,460.1) 205.9,460.1 203.1,457.3 203.1,453.8 214.9,442 214.9,436.1 348.2,436.1 v1@348.2,433.6
TS_7: RT_7B.1 TS_C8_A.2 TS_C8_B.2 U2.2 | length 401
  Top Layer w0.2: U2.2@202.7,462.112 203.8,462.112 203.8,459.419 RT_7B.1@206.792,459.419 RT_7B.1@206.8,459.419 ; TS_C8_A.2@358.7,435.1 358.8,435.1 v1(358.8,433.619) ; v1(367.2,516.2) TS_C8_B.2@367.2,516.992 TS_C8_B.2@367.2,517.2
  Bottom Layer w0.2: 214.2,465.7 214.2,464.7 ; v1@358.8,433.7 358.8,436.5 215.3,436.5 215.3,442.2 203.5,454 203.5,457 205.9,459.4 v1(206,459.4) 209.9,459.4 214.2,463.7 214.2,464.7 ; v1(367.2,516.2) 367.2,511.8 214.2,511.8 214.2,464.7
TS_8: RT_8B.1 U2.23 | length 348
  Top Layer w0.2: U2.23@197.25,462.087 198.8,462.087 198.8,458.7 203,454.5 v1(207.9,454.5) 208.781,454.5 208.8,454.519 RT_8B.1@208.8,454.719
  Bottom Layer w0.2: v1(207.9,454.5) 209.9,454.5 ; 209.919,454.519 217,461.6 217,509 488.7,509
TS_9: RT_9B.1 TS_C9_A.2 TS_C9_B.2 U2.22 | length 654
  Top Layer w0.2: U2.22@197.25,462.737 199.2,462.737 199.2,459 203,455.2 v1(206,455.2) 206.581,455.2 RT_9B.1@206.8,455.419 ; v1@488.7,433.6 TS_C9_A.2@488.7,434.992 ; v1(488.7,516.3) TS_C9_B.2@488.7,516.992
  Bottom Layer w0.2: v1@206.1,455.3 v1(206,455.2) 206.8,455.2 ; v1@488.7,433.7 488.7,438.9 217.7,438.9 217.7,443.4 206.8,454.3 206.8,455.2 ; v1@488.7,516.2 488.7,509.4 216.6,509.4 216.6,461.9 209.9,455.2 206.8,455.2
  other v1: 488.7,433.619
TS_10: RT_10B.1 TS_C10_A.2 TS_C10_B.2 U2.21 | length 611.3
  Top Layer w0.2: U2.21@197.25,463.387 199.6,463.387 199.6,459.3 203,455.9 v1(205.6,455.9) 208.881,455.9 RT_10B.1@208.9,455.919 ; v1(461.3,516.2) TS_C10_B.2@461.3,517.092 TS_C10_B.2@461.3,517.1 ; v1@469.7,433.7 TS_C10_A.2@469.7,434.992
  Bottom Layer w0.2: v1@205.6,456 v1(205.6,455.9) ; v1(461.3,516.2) 461.3,509.8 216.2,509.8 216.2,462.2 209.9,455.9 v1(205.6,455.9) ; v1@469.7,433.7 469.7,438.5 217.3,438.5 217.3,443.2 205.5,455 205.5,455.8 v1(205.6,455.9)
  other v1: 469.7,433.619
TS_11: RT_11B.1 TS_C11_A.2 TS_C11_B.2 U2.20 | length 567.1
  Top Layer w0.2: U2.20@197.25,464.037 200,464.037 200,459.6 203,456.6 v1(206,456.6) 206.573,456.6 206.592,456.619 206.792,456.419 RT_11B.1@206.8,456.419 ; v1@439.8,433.7 TS_C11_A.2@439.8,434.992 ; v1(448.2,516.3) TS_C11_B.2@448.2,517.092
  Bottom Layer w0.2: v1@439.8,433.8 439.8,438.1 216.9,438.1 216.9,443 205.1,454.8 205.1,456.2 205.5,456.6 v1(206,456.6) 209.9,456.6 215.8,462.5 215.8,510.2 448.2,510.2 v1(448.2,516.3)
  other v1: 439.8,433.6
TS_12: RT_12B.1 TS_C12_A.2 TS_C12_B.2 U2.19 | length 532.5
  Top Layer w0.2: U2.19@197.25,464.687 200.4,464.687 200.4,459.9 203,457.3 v1(206.8,457.3) 208.781,457.3 208.8,457.319 RT_12B.1@208.9,457.219 ; v1(420.8,516.3) TS_C12_B.2@420.8,517.092 ; TS_C12_A.2@429.1,434.9 429.2,434.9 v1(429.2,433.619)
  Bottom Layer w0.2: v1@420.8,516.4 v1(420.8,516.3) 420.8,510.6 215.4,510.6 215.4,462.8 209.9,457.3 v1(206.8,457.3) 205.6,457.3 204.7,456.4 204.7,454.6 216.5,442.8 216.5,437.7 429.2,437.7 v1@429.2,433.6
TS_13: RT_13B.1 TS_C13_B.2 TS_C13A.2 U2.18 | length 487.8
  Top Layer w0.2: U2.18@197.25,465.337 200.8,465.337 200.8,460.2 203,458 v1(206,458) 206.773,458 RT_13B.1@206.792,458.019 RT_13B.1@206.8,458.019 ; v1@399.3,433.7 TS_C13A.2@399.3,434.992 ; v1(407.7,516.2) TS_C13_B.2@407.7,516.992 TS_C13_B.2@407.7,517
  Bottom Layer w0.2: 399.3,433.9 399.3,437.3 216.1,437.3 216.1,442.6 204.3,454.4 204.3,456.6 205.7,458 v1(206,458) 209.9,458 215,463.1 215,511 407.7,511 v1(407.7,516.2) v1@407.7,516.3
  other v1: 399.3,433.6
TS_14: RT_14B.1 TS_C14_A.2 TS_C14_B.2 U2.17 | length 453.1
  Top Layer w0.2: U2.17@197.25,465.987 201.2,465.987 201.2,460.5 203,458.7 v1(206.8,458.7) 208.873,458.7 RT_14B.1@208.892,458.719 RT_14B.1@208.9,458.719 ; v1(380.3,516.2) TS_C14_B.2@380.3,516.9 ; v1(388.7,433.619) TS_C14_A.2@388.7,434.8
  Bottom Layer w0.2: 214.6,464.9 214.6,464.3 ; v1@380.3,516.1 380.3,511.4 214.6,511.4 214.6,464.3 ; v1@388.7,433.8 388.7,436.9 215.7,436.9 215.7,442.4 203.9,454.2 203.9,456.8 205.8,458.7 v1(206.8,458.7) 209.9,458.7 214.6,463.4 214.6,464.3
TS_15: CTS_15.2 RT_15B.1 RTS2.2 U2.16 | length 4.6
  Top Layer w0.2: CTS_15.2@194.293,466.219 CTS_15.2@194.499,466.219 ; CTS_15.2@194.3,466.419 194.396,466.323 CTS_15.2@194.499,466.219 ; U2.16@197.25,466.637 196.325,466.637 196.107,466.419 194.699,466.419 CTS_15.2@194.499,466.219 ; RTS2.2@391.273,401.7 391.273,402.9